# Altium PCB PCB-ESP32-C3-RF-V1.0.PcbDoc (part 1 of 4)
Units mil, origin at the board's own origin, x right, y up, seen from the top; angles counter-clockwise.
Board outline 1166.03 x 1736.03 mil, 4 copper layers (L1, L2, L3, L4), stack 30.315 mil thick; 70 components, 58 nets, 232 pads, 398 vias.
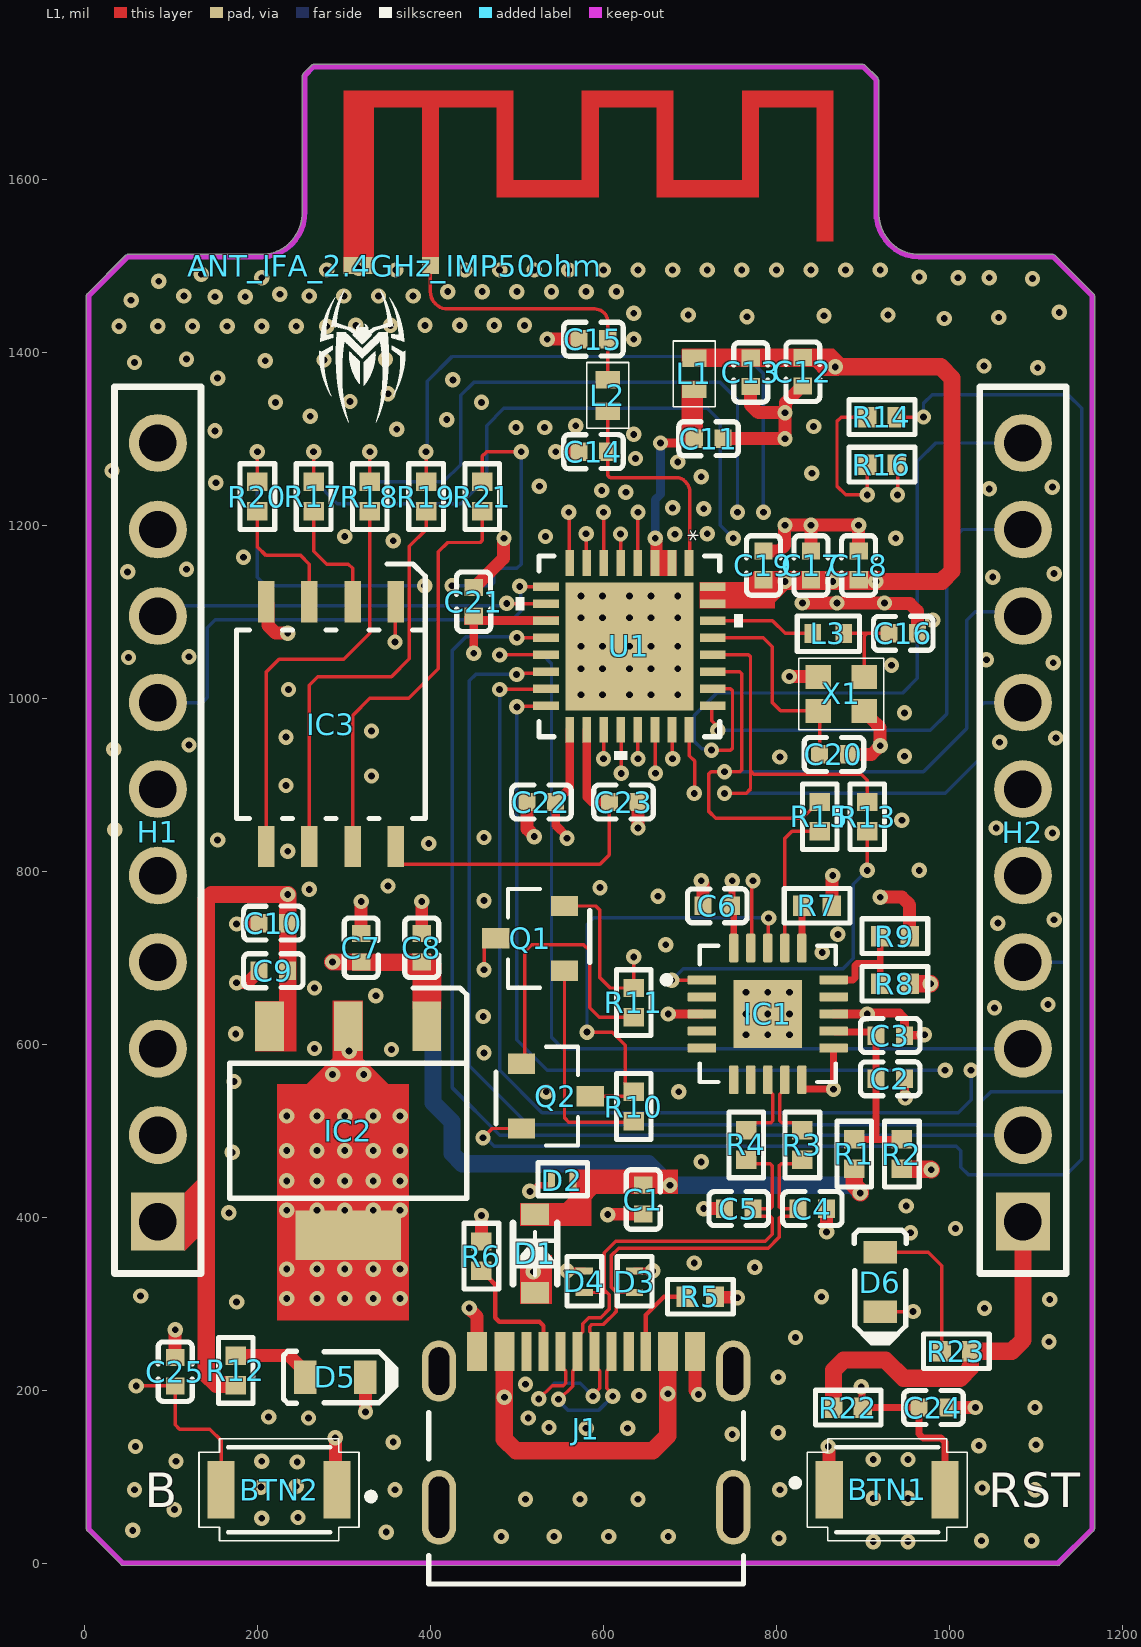
[diagram p0: L1 view]
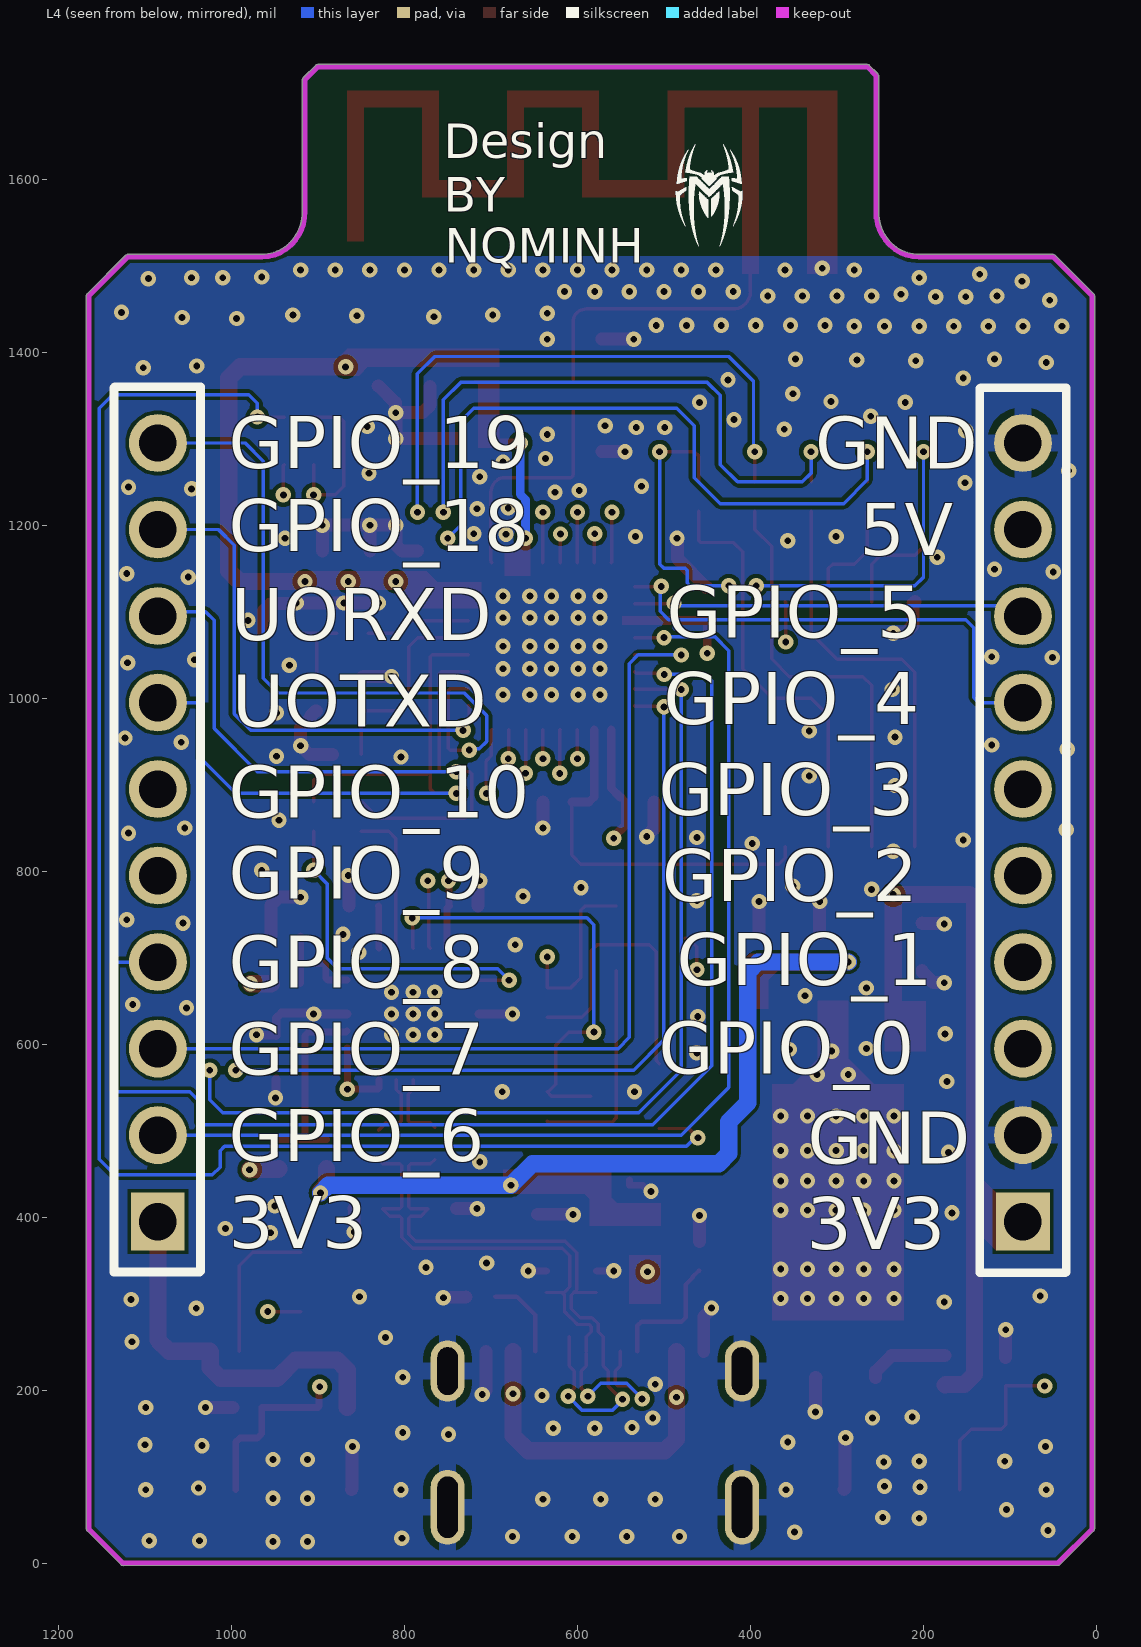
[diagram p1: L4 view, seen from below]
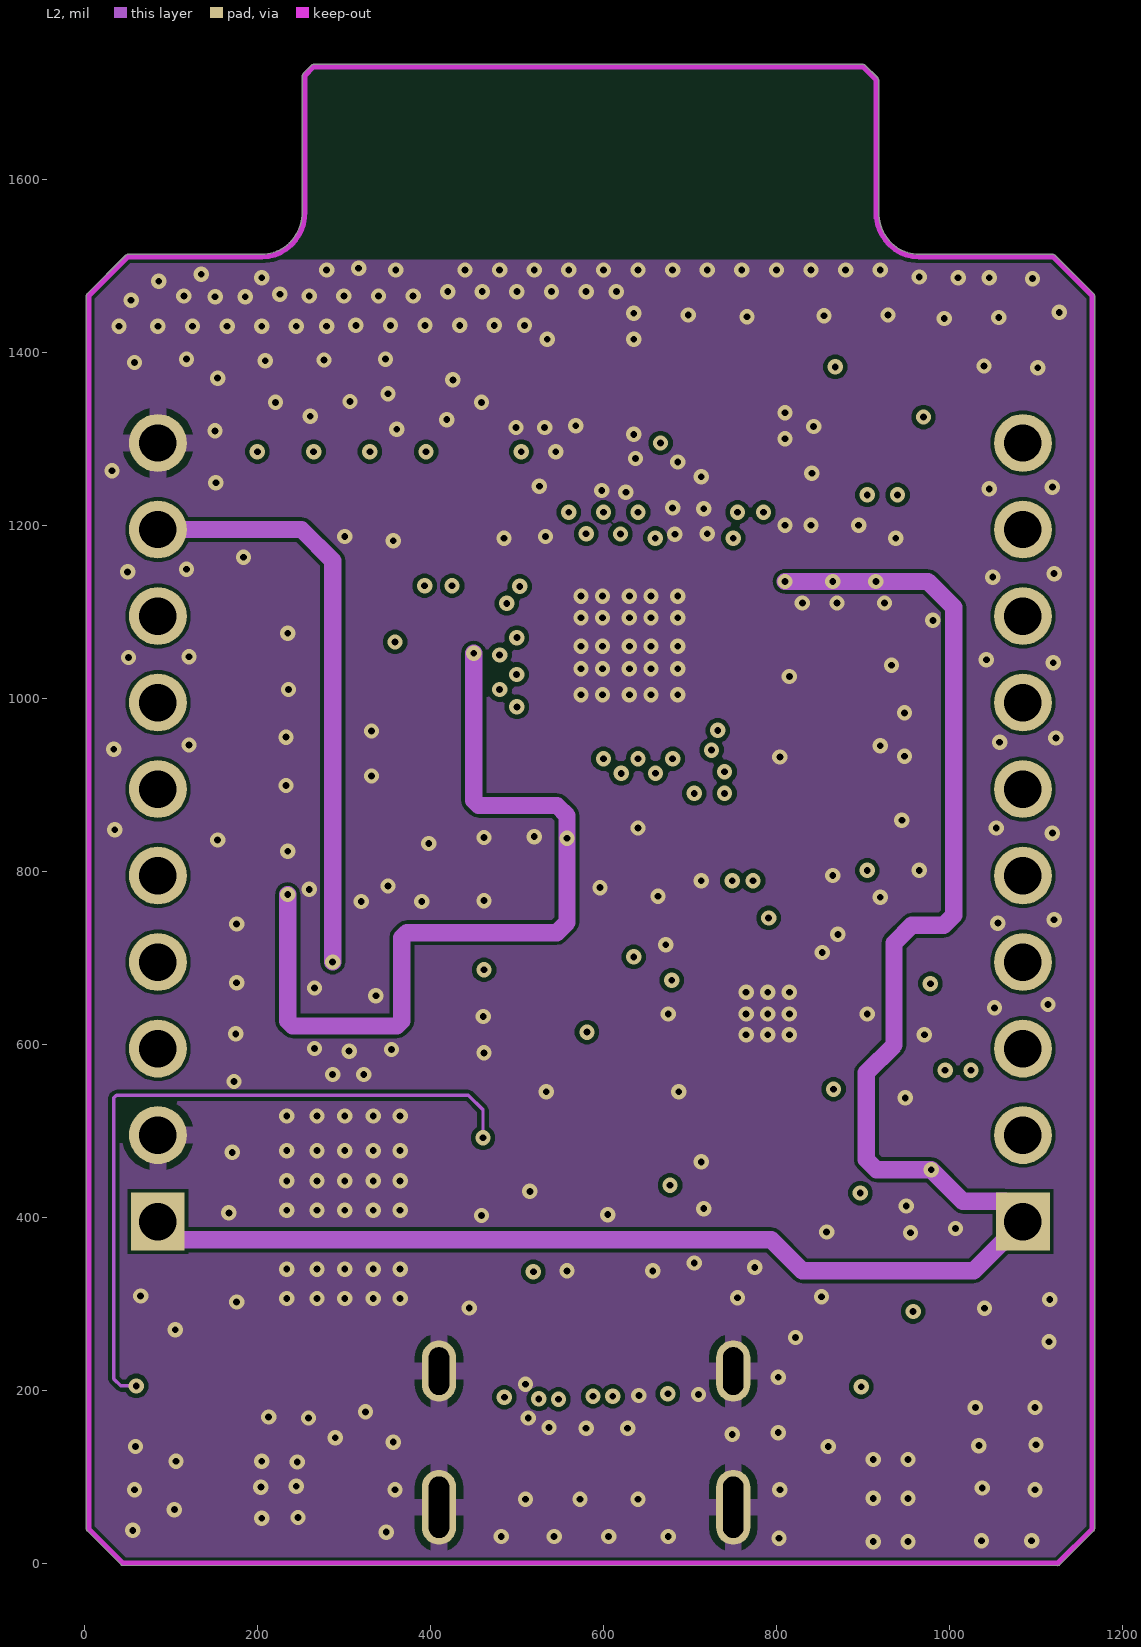
[diagram p2: L2]
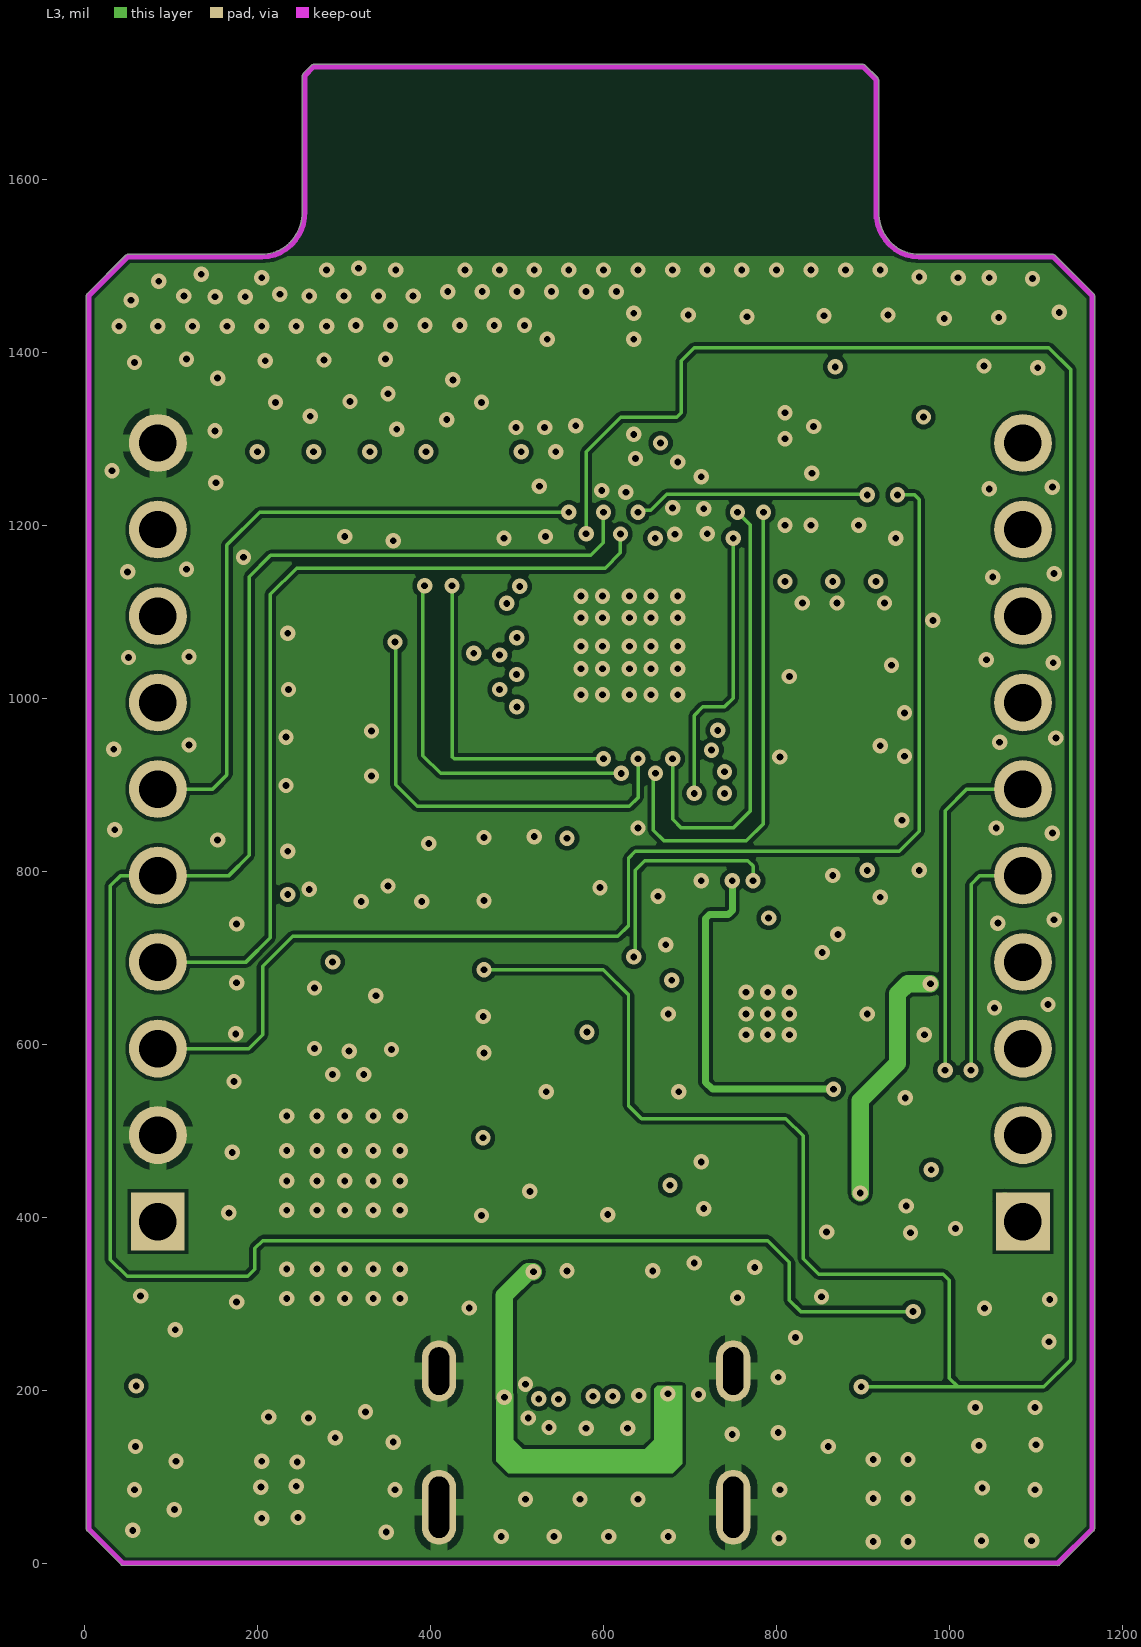
[diagram p3: L3]
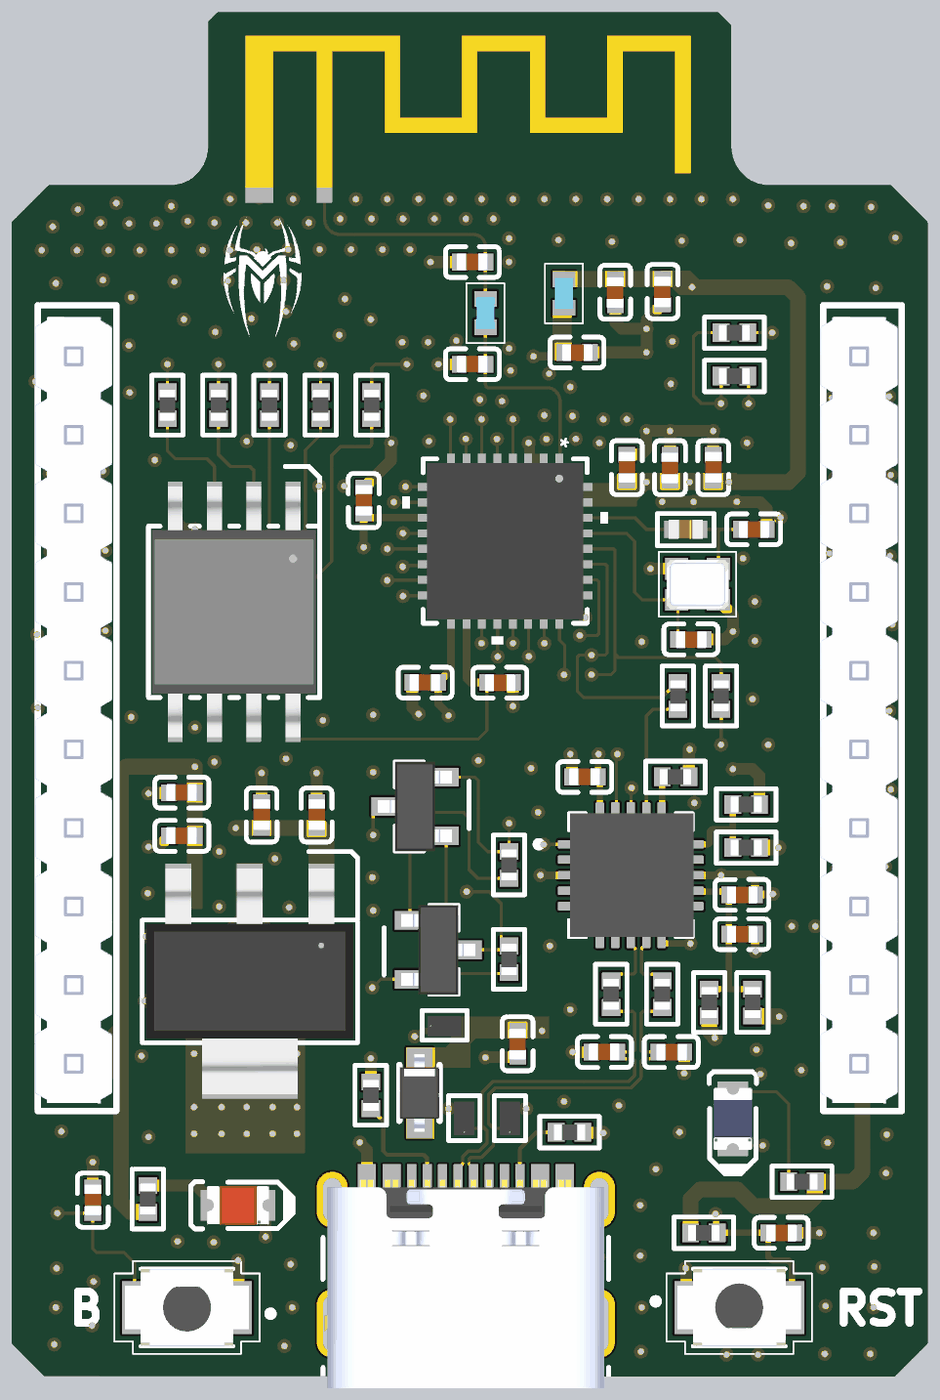
[diagram p5: 3D render of the assembled board from above, using the file's embedded part models]

## Layer stack, top to bottom
Top Solder: solder mask 0.5, Solder Resist, Dk 3.8
L1: signal copper 1.378
Dielectric 1: prepreg 7.874, 7628, Dk 4.6
L2: signal copper 0.689
Core: core 10.433, FR-4, Dk 4.5
L3: signal copper 0.689
Dielectric 2: prepreg 7.874, 7628, Dk 4.6
L4: signal copper 1.378
Bottom Solder: solder mask 0.5, Solder Resist, Dk 3.8

## Board outline
42.87,-2.13 2.87,37.87 1.98,40 1.98,1465 2.87,1467.13 47.87,1512.13 50,1513.02 205,1513.02 ccw(c205,1558.28) 237.01,1526.27 ccw(c200.86,1562.43) 251.98,1562.43 251.98,1720 252.87,1722.13 262.87,1732.13 265.02,1733.01 900,1733.02 902.13,1732.13 917.13,1717.13 918.02,1715 918.02,1562.43 ccw(c969.14,1562.43) 932.99,1526.27 ccw(c965,1558.28) 965,1513.02 1120,1513.02 1122.13,1512.13 1167.13,1467.13 1168.01,1465 1168.01,40 1167.13,37.87 1127.13,-2.13 1125,-3.01

## Design rules (kind name [scope] priority, off if disabled: settings)
BoardOutlineClearance [All] p1: gap=0 ignorepadtopadclearanceinfootprint=FALSE
Clearance ignore_Clearence_Antenna [WithinRoom('Antenna_2.4Ghz')] p1: gap=0 ignorepadtopadclearanceinfootprint=TRUE
Clearance [All] p2: gap=4 ignorepadtopadclearanceinfootprint=FALSE except(5: Arc-Via Track-Via SMDPad-Via THPad-Via Via-Via Via-Fill Via-Poly Via-Region Via-Text; 9.84: Arc-Hole Track-Hole SMDPad-Hole THPad-Hole Via-Hole Fill-Hole Poly-Hole Region-Hole Text-Hole)
ComponentClearance [All] p1: gap=4 collisioncheckmode=3 verticalgap=4 showdistances=TRUE
DiffPairsRouting [All] p1: maxlimit=4 minlimit=4 mostfreqgap=4 toplayer_minwidth=4 toplayer_maxwidth=71497.94 toplayer_prefwidth=4 midlayer1_minwidth=4 midlayer1_maxwidth=71497.94 midlayer1_prefwidth=4 midlayer2_minwidth=4 midlayer2_maxwidth=71497.94 midlayer2_prefwidth=4 bottomlayer_minwidth=4 bottomlayer_maxwidth=71497.94 bottomlayer_prefwidth=4 maxuncoupledlength=500
Height [All] p1: minheight=0 maxheight=71497.94 prefheight=500
HoleSize [All] p1: absolutevalues=TRUE maxlimit=248.03 minlimit=7.87 maxpercent=80.000 minpercent=20.000
HoleToHoleClearance [All] p1: gap=9.84 allowstackedmicrovias=FALSE
MinimumAnnularRing [All] p1: minimumring=3
MinimumSolderMaskSliver [All] p1: minsoldermaskwidth=0
PlaneClearance [All] p1: clearance=4
PlaneConnect PlaneConnectPowerPads [InPadClass('PowerPads')] p1: planeconnectstyle=Direct reliefexpansion=20 reliefentries=4 reliefconductorwidth=10 reliefairgap=10
PlaneConnect [All] p2: pad.planeconnectstyle=Relief pad.reliefexpansion=20 pad.reliefentries=4 pad.reliefconductorwidth=20 pad.reliefairgap=10 via.planeconnectstyle=Direct via.reliefexpansion=11.81 via.reliefentries=4 via.reliefconductorwidth=5 via.reliefairgap=5
PolygonConnect PolygonConnectPowerPads [All vs (InPadClass('PowerPads'))] p1: connectstyle=Direct reliefconductorwidth=10 reliefentries=4 polygonreliefangle="90 Angle" airgapwidth=10
PolygonConnect [All] p2: thpad.connectstyle=Relief thpad.reliefconductorwidth=20 thpad.reliefentries=4 thpad.polygonreliefangle="90 Angle" thpad.airgapwidth=8 smdpad.connectstyle=Relief smdpad.reliefconductorwidth=20 smdpad.reliefentries=4 smdpad.polygonreliefangle="90 Angle" smdpad.airgapwidth=8 via.connectstyle=Direct via.reliefconductorwidth=5 via.reliefentries=4 via.polygonreliefangle="90 Angle" via.airgapwidth=5
RoomDefinition Antenna_2.4Ghz [False vs False] p1: confinementstyle=ConfineIn formatcopy=TRUE lockcomponents=FALSE outline 279,1487 880,1487 880,1720 279,1720
RoutingVias [All] p1: holewidth=7.87 width=17.72 viastyle="Through Hole" minholewidth=7.87 minwidth=17.72 maxholewidth=248.03 maxwidth=257.87
ShortCircuit [WithinRoom('Antenna_2.4Ghz')] p1: allowed=TRUE
SilkToSilkClearance [All] p1: silktosilkclearance=0
SilkToSolderMaskClearance [IsPad] p1: minsilkscreentomaskgap=5 clearancetoexposedcopper=TRUE
SolderMaskExpansion [All] p1: expansion=2.95 istentingtop=FALSE
SupplyNets "Schematic Supply Nets_3" [InNet('+3V3_RF')] p1: voltage=0.000
SupplyNets "Schematic Supply Nets_2" [InNet('GND')] p2: voltage=0.000
SupplyNets "Schematic Supply Nets_1" [InNet('+5V')] p3: voltage=0.000
SupplyNets "Schematic Supply Nets" [InNet('+3V3')] p4: voltage=0.000
Width [All] p1: maxlimit=71497.94 minlimit=4 preferedwidth=4
19 further rules are at their usual default settings.

## Classes and differential pairs
component class USBC-UART: C1 C2 C3 C4 C5 C6 D1 D2 D3 D4 IC1 J1 Q1 Q2 R1 R2 R3 R4 R5 R6 R7 R8 R9 R10 R11
component class RF: C11 C12 C13 C14 C15 L1 L2
component class POWER_SUPPLY: C7 C8 C9 C10 D5 IC2 R12
component class MCU: BTN1 BTN2 C16 C17 C18 C19 C20 C21 C22 C23 C24 C25 D6 H1 H2 IC3 L3 R13 R14 R15 R16 R17 R18 R19 R20 R21 R22 R23 U1 X1
differential pair USB_D: +USB_D_P -USB_D_N
differential pair FTDI_USB: +FTDI_USB_P -FTDI_USB_N

## Components (designator, comment, footprint, x,y, rotation, side; value= is the part's Value field where it differs from the comment)
ANT_IFA_2.4GHz_IMP50ohm "ANT_IFA_2.4GHz" ANT_IFA_2.4GHZ 317.06,1500.1 r0 top
BTN1 "SWITCH TACTILE SPST-NO 0.05A 12V" SW_B3U-1000P 928.07,85 r0 top
BTN2 "SWITCH TACTILE SPST-NO 0.05A 12V" SW_B3U-1000P 225,85 r180 top
C1 "CAP CER 100nF 50V X5R 0402" C0402 646,422 r90 top value=100nF
C2 "CAP CER 47PF 50V C0G/NPO 0402" C0402 930,560 r180 top value=47pF
C3 "CAP CER 100nF 50V X5R 0402" C0402 930,610 r180 top value=100nF
C4 "CAP CER 47PF 50V C0G/NPO 0402" C0402 840,410 r180 top value=47pF
C5 "CAP CER 47PF 50V C0G/NPO 0402" C0402 758,410 r0 top value=47pF
C6 "CAP CER 100nF 50V X5R 0402" C0402 733.07,760 r0 top value=100nF
C7 "CAP CER 100nF 50V X5R 0402" C0402 320,710 r270 top value=100nF
C8 "CAP CER 47PF 50V C0G/NPO 0402" C0402 390,710 r270 top value=47pF
C9 "CAP CER 47PF 50V C0G/NPO 0402" C0402 220,685 r0 top value=47pF
C10 "CAP CER 100nF 50V X5R 0402" C0402 220,740 r0 top value=100nF
C11 "CAP CER 1UF 10V X5R 0402" C0402 720,1300 r180 top value=1µF
C12 "CAP CER 10UF 10V X5R 0402" C0402 830.57,1378.9 r90 top value=10µF
C13 "CAP CER 100nF 50V X5R 0402" C0402 770.28,1378.14 r90 top value=100nF
C14 "GRM1555C2A3R3CA01D" C0402 590,1285 r0 top value=3.3pF
C15 "GRM1555C2A3R3CA01D" C0402 590,1415 r0 top value=3.3pF
C16 "CAP CER 10PF 50V C0G/NPO 0402" C0402 945,1075 r180 top value=10pF
C17 "CAP CER 1UF 10V X5R 0402" C0402 840,1155 r90 top value=1µF
C18 "CAP CER 10000PF 16V X7R 0402" C0402 895,1151.93 r270 top value=10nF
C19 "CAP CER 10UF 10V X5R 0402" C0402 785,1151.93 r270 top value=10µF
C20 "CAP CER 10PF 50V C0G/NPO 0402" C0402 865,935 r180 top value=10pF
C21 "CAP CER 100nF 50V X5R 0402" C0402 450,1110 r270 top value=100nF
C22 "CAP CER 100nF 50V X5R 0402" C0402 529.84,880 r0 top value=100nF
C23 "CAP CER 1UF 10V X5R 0402" C0402 621.77,880 r180 top value=1µF
C24 "CAP CER 1UF 10V X5R 0402" C0402 980,180 r180 top value=1µF
C25 "CAP CER 1UF 10V X5R 0402" C0402 105,220 r270 top value=1µF
D1 "BAT20JFILM" SOD-323 521,358 r270 top value=20pF
D2 "TVS DIODE 5.3VWM 12VC SOD882" RTVS_SOD882_LTF-L 552.5,443 r0 top
D3 "TVS DIODE 5.3VWM 12VC SOD882" RTVS_SOD882_LTF-L 636,325.5 r90 top
D4 "TVS DIODE 5.3VWM 12VC SOD882" RTVS_SOD882_LTF-L 578,325.5 r90 top
D5 "LTST-C171KRKT" LED_LTST-C171_LTO-L 290,215 r180 top
D6 "LED BLUE CLEAR CHIP SMD" LED_0805_BLUE 920,325 r90 top
H1 "CONN HEADER VERT 10POS 2.54MM" "HEADER 1*10 2.54MM" 85,395 r90 top
H2 "CONN HEADER VERT 10POS 2.54MM" "HEADER 1*10 2.54MM" 1085,395 r90 top
IC1 "IC USB SERIAL FULL UART 20QFN" QFN50P400X400X80-21N 790,635 r0 top
IC2 "IC REG LIN 3.3V 1.5A SOT-223-4" DCY4_TEX-L 305,500 r180 top locked
IC3 "IC FLASH 32MBIT SPI/QUAD 8SOIC" SOIC-8_5P28X5P28_WIN-L 285,970 r270 top
J1 "CONN RCP USB2.0 TYP C 24P SMD RA" MOLEX_2171790001 580,110 r0 top
L1 "FIXED IND 2.2NH 2.53A 22 MOHM" INDC1006X60N 705,1375 r90 top value=2.2nH
L2 "FIXED IND 2.2NH 2.53A 22 MOHM" INDC1006X60N 605,1350 r270 top value=2.2nH
L3 "FIXED IND 27NH 200MA 900 MOHM" IND_L-0402_JOT-L 860,1075 r180 top value=27nH
Q1 "TRANS NPN 25V 1.5A SOT-23-3" TRANS_SS8050-G 515.24,722.4 r180 top
Q2 "TRANS NPN 25V 1.5A SOT-23-3" TRANS_SS8050-G 545,540 r0 top
R1 "RES 0 OHM JUMPER 1/16W 0402" R0402 911,511.99 r270 top value=0Ω
R2 "RES 0 OHM JUMPER 1/16W 0402" R0402 966,511.99 r270 top value=0Ω
R3 "RES SMD 27 OHM 1% 1/16W 0402" R0402 809,444.62 r90 top value=27Ω
R4 "RES SMD 27 OHM 1% 1/16W 0402" R0402 744,444.62 r90 top value=27Ω
R5 "RES 5.1kΩ ±1% 62.5mW 0402" R0402 672.99,329 r0 top value=5.1kΩ
R6 "RES 5.1kΩ ±1% 62.5mW 0402" R0402 438,315.99 r90 top value=5.1kΩ
R7 "RES SMD 10K OHM 1% 1/16W 0402" R0402 886.01,739 r180 top value=10kΩ
R8 "RES SMD 4.7K OHM 1% 1/16W 0402" R0402 898.01,691 r0 top value=4.7kΩ
R9 "RES SMD 10K OHM 1% 1/16W 0402" R0402 976.01,704 r180 top value=10kΩ
R10 "RES 5.1kΩ ±1% 62.5mW 0402" R0402 656,566.99 r270 top value=5.1kΩ
R11 "RES 5.1kΩ ±1% 62.5mW 0402" R0402 656,686.99 r270 top value=5.1kΩ
R12 "RES 5.1kΩ ±1% 62.5mW 0402" R0402 196,261.99 r270 top value=5.1kΩ
R13 "RES 0 OHM JUMPER 1/16W 0402" R0402 926,901.99 r270 top value=0Ω
R14 "RES SMD 27 OHM 1% 1/16W 0402" R0402 961.01,1304 r180 top value=27Ω
R15 "RES 0 OHM JUMPER 1/16W 0402" R0402 871,901.99 r270 top value=0Ω
R16 "RES SMD 27 OHM 1% 1/16W 0402" R0402 961.01,1249 r180 top value=27Ω
R17 "RES 0 OHM JUMPER 1/16W 0402" R0402 286,1271.99 r270 top value=0Ω
R18 "RES 0 OHM JUMPER 1/16W 0402" R0402 351,1271.99 r270 top value=0Ω
R19 "RES 0 OHM JUMPER 1/16W 0402" R0402 416,1271.99 r270 top value=0Ω
R20 "RES 0 OHM JUMPER 1/16W 0402" R0402 221,1271.99 r270 top value=0Ω
R21 "RES 0 OHM JUMPER 1/16W 0402" R0402 481,1271.99 r270 top value=0Ω
R22 "RES 5.1kΩ ±1% 62.5mW 0402" R0402 921.99,159 r180 top value=5.1kΩ
R23 "RES 560 OHM 1% 1/16W 0402" R0402 968.99,266 r0 top value=560Ω
U1 "ESP32-C3" ESP-C3 630,1060 r270 top
X1 "CRYSTAL 40.0000MHZ 8PF SMD" OSC_XRCGB40M000F1S1BR0 875,1005 r270 top

## Footprints (in the part's own frame and the unit in brackets; to place one, negate y for a bottom-side part, rotate by r counter-clockwise, add the part's x,y. Pads: shape width x height; smd on the part's side, far side on the other; paste and mask are expansions set on the pad)
ANT_IFA_2.4GHZ [mm]
  rect 0.9x0.5 smd mask-2539.97: 1(0,0)
  rect 0.5x0.5 smd mask-2539.97: 2(2.107,-0.003)
  L1 region: -0.45,-0.254 0.45,-0.254 0.45,5.146 -0.45,5.146
  L1 region: 13.95,5.146 13.45,5.146 13.45,0.706 13.95,0.706
  L1 region: 11.25,5.146 11.25,4.646 13.95,4.646 13.95,5.146
  L1 region: 11.25,2.006 11.75,2.006 11.75,5.146 11.25,5.146
  L1 region: 11.75,2.006 11.75,2.506 8.75,2.506 8.75,2.006
  L1 region: 9.25,5.146 8.75,5.146 8.75,2.006 9.25,2.006
  L1 region: 9.25,4.646 9.25,5.146 6.55,5.146 6.55,4.646
  L1 region: 1.857,-0.253 2.357,-0.253 2.357,5.146 1.857,5.146
  L1 region: -0.45,5.146 -0.45,4.646 4.55,4.646 4.55,5.146
  L1 region: 4.55,5.146 4.05,5.146 4.05,2.006 4.55,2.006
  L1 region: 7.05,2.006 7.05,2.506 4.05,2.506 4.05,2.006
  L1 region: 6.55,2.006 7.05,2.006 7.05,5.146 6.55,5.146
  L1 pour cut-out: -0.95,0.229 14.25,0.229 14.25,5.446 -0.95,5.446
C0402 [mm]
  rect 0.5x0.54 smd paste+0 mask+0.051: 1(-0.459,0) 2(0.381,0)
  silkscreen extent -0.91,-0.5 0.83,0.5, body extent -0.55,-0.27 0.45,0.28, height 0.51
DCY4_TEX-L [mil]
  rect 33x57.5 smd paste+0 mask+0: 1(-91,-120.75) 2(0,-120.75) 3(91,-120.75)
  rect 122x57.5 smd paste+0 mask+0: 4(0,120.75)
  silkscreen extent -137,-165 137,78, body extent -132,-144 132,144, height 67
ESP-C3 [mm]
  rect 0.757x0.255 smd paste+0 mask+0: 1(-2.449,1.75) 2(-2.449,1.25) 3(-2.449,0.75) 4(-2.449,0.25) 5(-2.449,-0.25) 6(-2.449,-0.75) 7(-2.449,-1.25) 8(-2.449,-1.75) 17(2.449,-1.75) 18(2.449,-1.25) 19(2.449,-0.75) 20(2.449,-0.25) 21(2.449,0.25) 22(2.449,0.75) 23(2.449,1.25) 24(2.449,1.75)
  rect 0.255x0.757 smd paste+0 mask+0: 9(-1.75,-2.449) 10(-1.25,-2.449) 11(-0.75,-2.449) 12(-0.25,-2.449) 13(0.25,-2.449) 14(0.75,-2.449) 15(1.25,-2.449) 16(1.75,-2.449) 25(1.75,2.449) 26(1.25,2.449) 27(0.75,2.449) 28(0.25,2.449) 29(-0.25,2.449) 30(-0.75,2.449) 31(-1.25,2.449) 32(-1.75,2.449)
  rect 3.759x3.759 smd paste-1.88 mask+0: 33(0,0)
  silkscreen extent -2.65,-3.34 3.34,3.34, body extent -2.53,-2.53 2.53,2.53, height 0.89
"HEADER 1*10 2.54MM" [mm]
  rect 1.7x1.575 hole 1.1 paste-2539.97 mask+0.051: 1(0,0)
  round 1.7 hole 1.1 paste-2539.97 mask+0.051: 2(2.54,0) 3(5.08,0) 4(7.62,0) 5(10.16,0) 6(12.7,0) 7(15.24,0) 8(17.78,0) 9(20.32,0) 10(22.86,0)
  silkscreen extent -1.52,-1.27 24.51,1.27, body extent -1.27,-1.14 24.13,1.36, height 8.11
IND_L-0402_JOT-L [mil]
  rect 19x22 smd paste+0 mask+0: 1(-18,0) 2(18,0)
  silkscreen extent -36,-20 36,21, body extent -21,-12 21,12, height 24
INDC1006X60N [mm]
  rect 0.51x0.73 smd: 1(-0.46,0) 2(0.46,0)
  silkscreen extent -0.96,-0.62 0.96,0.62, body extent -0.5,-0.3 0.5,0.3, height 0.61
LED_0805_BLUE [mil]
  rect 26x39 smd paste+0 mask+0: 1(-34.5,0) 2(34.5,0)
  silkscreen extent -70,-30 60,30, body extent -39,-25 39,25, height 31
LED_LTST-C171_LTO-L [mil]
  rect 26x39 smd paste+0 mask+0: 1(-34.5,0) 2(34.5,0)
  silkscreen extent -70,-30 60,30, body extent -39,-25 39,25, height 31
MOLEX_2171790001 [mm]
  rect 0.59x1.15 smd mask+0.064: A1B12(-3.2,3.425) A4B9(-2.4,3.425) B1A12(3.2,3.425) B4A9(2.4,3.425)
  rect 0.298x1.15 smd mask+0.064: A5(-1.25,3.425) A6(-0.25,3.425) A7(0.25,3.425) A8(1.25,3.425) B5(1.75,3.425) B6(0.75,3.425) B7(-0.75,3.425) B8(-1.75,3.425)
  oval 1x2.2 hole 0.6 slot 1.8 at 90 deg mask+0.064: SH1(-4.32,-1.15) SH2(4.32,-1.15)
  oval 1x1.8 hole 0.6 slot 1.4 at 90 deg mask+0.064: SH3(-4.32,2.85) SH4(4.32,2.85)
  silkscreen extent -4.62,-3.4 4.62,1.63, body extent -4.47,-3.25 4.47,3.5, height 3.24
OSC_XRCGB40M000F1S1BR0 [mm]
  rect 0.7x0.75 smd: 1(-0.5,0.675) 2(-0.5,-0.675) 3(0.5,-0.675) 4(0.5,0.675)
  silkscreen extent -1.05,-1.25 1.05,1.25, body extent -0.8,-1 0.8,1, height 0.7
QFN50P400X400X80-21N [mm]
  rrect25% 0.84x0.27 smd: 1(-1.935,1) 2(-1.935,0.5) 3(-1.935,0) 4(-1.935,-0.5) 5(-1.935,-1) 11(1.935,-1) 12(1.935,-0.5) 13(1.935,0) 14(1.935,0.5) 15(1.935,1)
  rrect25% 0.27x0.84 smd: 6(-1,-1.935) 7(-0.5,-1.935) 8(0,-1.935) 9(0.5,-1.935) 10(1,-1.935) 16(1,1.935) 17(0.5,1.935) 18(0,1.935) 19(-0.5,1.935) 20(-1,1.935)
  rect 2x2 smd paste-0.37: 21(0,0)
  silkscreen extent -3.07,-2 2,2, body extent -1.97,-2 2.03,2, height 0.81
R0402 [mm]
  rect 0.54x0.6 smd: 1(0.559,-0.533) 2(1.423,-0.533)
  silkscreen extent 0.03,-1.04 1.96,-0.03, body extent 0.49,-0.78 1.49,-0.28, height 0.37
RTVS_SOD882_LTF-L [mil]
  rect 8.06x20.03 smd paste+0 mask+0: 1(-12.5,0) 2(12.5,0)
  silkscreen extent -28,-18 29,20, body extent -21,-13 21,13, height 22
SOD-323 [mm]
  rect 0.63x0.83 smd: A(1.15,0) C(-1.15,0)
  silkscreen extent -0.9,-0.65 0.9,0.65, body extent -1.25,-0.64 1.25,0.64, height 1.17
SOIC-8_5P28X5P28_WIN-L [mil]
  rect 47.75x19 smd paste+0 mask+0: 1(-141.53,75) 2(-141.53,25) 3(-141.53,-25) 4(-141.53,-75) 5(141.53,-75) 6(141.53,-25) 7(141.53,25) 8(141.53,75)
  silkscreen extent -185,-109 109,109, body extent -159,-104 159,104, height 85
SW_B3U-1000P [mm]
  rect 0.8x1.7 smd: 1(-1.7,0) 2(1.7,0)
  silkscreen extent -2.8,-1.5 2.35,1.5, body extent -2,-1.25 2,1.25, height 1.76
TRANS_SS8050-G [mm]
  rect 0.8x0.6 smd: 1(-1.01,0.95) 2(-1.01,-0.95) 3(1.01,0)
  silkscreen extent -1.75,-1.45 0.65,1.45, body extent -1.2,-1.45 1.2,1.45, height 1.16

## Part data
BTN1 BTN2: library part B3U-1000P, "Switch Tactile N.O. SPST Round Button Solder Tab 12VDC 200000Cycles 1.5N SMD Emboss T/R", Ambient Temperature Range High=70°C, Color=Silver, Contact Current Rating=50mA, Contact Resistance=100mΩ, Insulation Resistance=100MΩ, LCSC Part=C231329, Manufacturer=Omron, Manufacturer Package Identifier=B3U-1000P(M), Max Voltage Rating (DC)=12V, Min Operating Temperature=-25°C, Operating Force=1.99N, Ratings="Dust Proof, IP40", Supplier Part Number=SW1020CT-ND, Actuator Length=400µm, Category="Tactile Switches", ComponentLink1Description=https://datasheet.octopart.com:443/B3U-1000P-Omron-datasheet-62106914.pdf?src-supplier=IHS, ComponentLink1URL=https://datasheet.octopart.com:443/B3U-1000P-Omron-datasheet-62106914.pdf?src-supplier=IHS, ComponentLink2Description=https://datasheet.octopart.com:443/B3U-1000P-Omron-datasheet-10910421.pdf?src-supplier=RS+(Formerly+Allied+Electronics), ComponentLink2URL=https://datasheet.octopart.com:443/B3U-1000P-Omron-datasheet-10910421.pdf?src-supplier=RS+(Formerly+Allied+Electronics), ComponentLink3Description=https://datasheet.octopart.com:443/B3U-1000P-Omron-datasheet-5458533.pdf?src-supplier=Upverter, ComponentLink3URL=https://datasheet.octopart.com:443/B3U-1000P-Omron-datasheet-5458533.pdf?src-supplier=Upverter, ComponentLink4Description=https://datasheet.octopart.com:443/B3U-1000P-Omron-datasheet-11968313.pdf?src-supplier=SOS+electronic, ComponentLink4URL=https://datasheet.octopart.com:443/B3U-1000P-Omron-datasheet-11968313.pdf?src-supplier=SOS+electronic, ComponentLink5Description=https://datasheet.octopart.com:443/B3U-1000P-Omron-datasheet-110759174.pdf?src-supplier=Newark, ComponentLink5URL=https://datasheet.octopart.com:443/B3U-1000P-Omron-datasheet-110759174.pdf?src-supplier=Newark, ComponentLink6Description=https://datasheet.octopart.com:443/B3U-1000P-Omron-datasheet-506776.pdf?src-supplier=Newark, ComponentLink6URL=https://datasheet.octopart.com:443/B3U-1000P-Omron-datasheet-506776.pdf?src-supplier=Newark, ComponentLink7Description=https://datasheet.octopart.com:443/B3U-1000P-Omron-datasheet-17589256.pdf?src-supplier=TME, ComponentLink7URL=https://datasheet.octopart.com:443/B3U-1000P-Omron-datasheet-17589256.pdf?src-supplier=TME, Contact Material=Silver, Contact Plating=Silver, Current Rating=50mA, Depth=2.5mm, Electrical Life=200kcycles, Height=1.2mm, Illumination Type="Illuminated, Non-Illuminated", Lead Free="Lead Free", Length=3mm, Life (Cycles)=200kcycles, Lifecycle Status=Production, Manufacturer Part Number=B3U-1000P, Max Current Rating=50mA, Max Operating Temperature=70°C, Mechanical Life=200kcycles, Mounting Technology="Surface Mount", Number of Positions=1, Packaging="Tape and Reel", Pins=2, Pricing="1=1,17, 10=0,997, 25=0,9268, 100=0,8261, 250=0,76544, 500=0,72342, 1000=0,68504 (USD)", REACH SVHC=Yes, RoHS=Compliant, Sealable="DUST PROOF", Stock=127276, Supplier=DigiKey, Switch Function=Off-Mom, Switch Travel=150µm, Termination=SMD/SMT, Throw Configuration=SPST, Voltage Rating (DC)=12V, Weight=21.99923mg, Width=2.5mm
C1 C3 C6 C7 C10 C13 C21 C22: library part CC0402KRX5R9BB104, "50V 100nF X5R ±10% 0402 Multilayer Ceramic Capacitors MLCC - SMD/SMT ROHS", Case/Package=0402, Dielectric=X5R, Dielectric Material=Ceramic, LCSC Part=C105882, Manufacturer="Yageo Group", Max Operating Temperature=85°C, Min Operating Temperature=-55°C, Supplier Part Number=311-3342-2-ND, Temperature Coefficient=30ppm/°C, Tolerance=10%, Voltage Rating=50V, Category="Ceramic Capacitors", China RoHS=Compliant, ComponentLink1Description=https://datasheet.octopart.com:443/CC0402KRX5R9BB104-Yageo-datasheet-170350636.pdf?src-supplier=IHS, ComponentLink1URL=https://datasheet.octopart.com:443/CC0402KRX5R9BB104-Yageo-datasheet-170350636.pdf?src-supplier=IHS, ComponentLink2Description=https://datasheet.octopart.com:443/CC0402KRX5R9BB104-Yageo-datasheet-78855684.pdf?src-supplier=Upverter, ComponentLink2URL=https://datasheet.octopart.com:443/CC0402KRX5R9BB104-Yageo-datasheet-78855684.pdf?src-supplier=Upverter, ComponentLink3Description=https://datasheet.octopart.com:443/CC0402KRX5R9BB104-Yageo-datasheet-140260304.pdf?src-supplier=Newark, ComponentLink3URL=https://datasheet.octopart.com:443/CC0402KRX5R9BB104-Yageo-datasheet-140260304.pdf?src-supplier=Newark, ComponentLink4Description=https://datasheet.octopart.com:443/CC0402KRX5R9BB104-Yageo-datasheet-158238148.pdf?src-supplier=Newark, ComponentLink4URL=https://datasheet.octopart.com:443/CC0402KRX5R9BB104-Yageo-datasheet-158238148.pdf?src-supplier=Newark, ComponentLink5Description=https://datasheet.octopart.com:443/CC0402KRX5R9BB104-Yageo-datasheet-182029422.pdf?src-supplier=Farnell, ComponentLink5URL=https://datasheet.octopart.com:443/CC0402KRX5R9BB104-Yageo-datasheet-182029422.pdf?src-supplier=Farnell, ComponentLink6Description=https://datasheet.octopart.com/CC0402KRX5R9BB104-Yageo-datasheet-86397281.pdf, ComponentLink6URL=https://datasheet.octopart.com/CC0402KRX5R9BB104-Yageo-datasheet-86397281.pdf, ComponentLink7Description=https://datasheet.octopart.com:443/CC0402KRX5R9BB104-Yageo-datasheet-149070021.pdf?src-supplier=TME, ComponentLink7URL=https://datasheet.octopart.com:443/CC0402KRX5R9BB104-Yageo-datasheet-149070021.pdf?src-supplier=TME, ComponentLink8Description=https://datasheet.octopart.com:443/CC0402KRX5R9BB104-Yageo-Group-datasheet-145016144.pdf?src-supplier=ODG+(Origin+Data+Global), ComponentLink8URL=https://datasheet.octopart.com:443/CC0402KRX5R9BB104-Yageo-Group-datasheet-145016144.pdf?src-supplier=ODG+(Origin+Data+Global), ComponentLink9Description=https://datasheet.octopart.com:443/CC0402KRX5R9BB104-Yageo-datasheet-137875056.pdf?src-supplier=Future+Electronics, ComponentLink9URL=https://datasheet.octopart.com:443/CC0402KRX5R9BB104-Yageo-datasheet-137875056.pdf?src-supplier=Future+Electronics, ComponentLink10Description=https://datasheet.octopart.com:443/CC0402KRX5R9BB104-Yageo-datasheet-137700085.pdf?src-supplier=Future+Electronics, ComponentLink10URL=https://datasheet.octopart.com:443/CC0402KRX5R9BB104-Yageo-datasheet-137700085.pdf?src-supplier=Future+Electronics, ComponentLink11Description=https://datasheet.octopart.com:443/CC0402KRX5R9BB104-Yageo-datasheet-62067349.pdf?src-supplier=Future+Electronics, ComponentLink11URL=https://datasheet.octopart.com:443/CC0402KRX5R9BB104-Yageo-datasheet-62067349.pdf?src-supplier=Future+Electronics, ComponentLink12Description=https://datasheet.octopart.com:443/CC0402KRX5R9BB104-Yageo-datasheet-68071816.pdf?src-supplier=Future+Electronics, ComponentLink12URL=https://datasheet.octopart.com:443/CC0402KRX5R9BB104-Yageo-datasheet-68071816.pdf?src-supplier=Future+Electronics, ComponentLink13Description=https://datasheet.octopart.com:443/CC0402KRX5R9BB104-Yageo-datasheet-68297942.pdf?src-supplier=Future+Electronics, ComponentLink13URL=https://datasheet.octopart.com:443/CC0402KRX5R9BB104-Yageo-datasheet-68297942.pdf?src-supplier=Future+Electronics, ComponentLink14Description=http://sigma.octopart.com:80/conflict_mineral_statement/Yageo-company-3.pdf?src-supplier=Compliance+Statements, ComponentLink14URL=http://sigma.octopart.com:80/conflict_mineral_statement/Yageo-company-3.pdf?src-supplier=Compliance+Statements, ComponentLink15Description=http://sigma.octopart.com:80/rohs_statement/Yageo-company-2.pdf?src-supplier=Compliance+Statements, ComponentLink15URL=http://sigma.octopart.com:80/rohs_statement/Yageo-company-2.pdf?src-supplier=Compliance+Statements, Country of Origin="Mainland China, Taiwan", Export Control Classification Number (ECCN) Code=EAR99, Halogen Free="Halogen Free", Harmonized Tariff Schedule (HTS) Code=8532.24.00.20, Height=500µm, Introduction Date=2013-02-05, Lead Free="Lead Free", Length=1mm, Lifecycle Status=Production, Manufacturer Part Number=CC0402KRX5R9BB104, Material=Ceramic, Mounting Technology="Surface Mount", Number of Terminals=2, Pricing="10000=0,00742, 20000=0,00677, 30000=0,00644, 50000=0,00608, 70000=0,00587, 100000=0,00567 (USD)", REACH SVHC=Yes, RoHS=Compliant, Schedule B="8532240020, 8532240020|8532240020|8532240020|8532240020|8532240020|8532240020|8532240020|8532240020|8532240020|8532240020|8532240020|8532240020|8532240020|8532240020|8532240020|8532240020|8532240020|8532240020|8532240020|8532240020|8532240020|8532240020|8532240020|85", Stock=2840000, Supplier=DigiKey, Thickness=558.8µm, Voltage Rating (DC)=50V, Width=500µm
C2 C4 C5 C8 C9: library part CC0402FRNPO9BN470, "50V 47pF NP0 ±1% 0402 Multilayer Ceramic Capacitors MLCC - SMD/SMT ROHS", Case Code (Imperial)=0402, Case Code (Metric)=1005, Dielectric=C0G, Dielectric Material=Ceramic, LCSC Part=C277503, Manufacturer="Yageo Group", Max Operating Temperature=125°C, Min Operating Temperature=-55°C, Supplier Part Number=311-1646-1-ND, Tolerance=1%, Voltage Rating=50V, Case/Package=0402, Category="Ceramic Capacitors", China RoHS=Compliant, ComponentLink1Description=https://datasheet.octopart.com:443/CC0402FRNPO9BN470-Yageo-datasheet-182140217.pdf?src-supplier=IHS, ComponentLink1URL=https://datasheet.octopart.com:443/CC0402FRNPO9BN470-Yageo-datasheet-182140217.pdf?src-supplier=IHS, ComponentLink2Description=https://datasheet.octopart.com:443/CC0402FRNPO9BN470-Yageo-datasheet-181966869.pdf?src-supplier=Newark, ComponentLink2URL=https://datasheet.octopart.com:443/CC0402FRNPO9BN470-Yageo-datasheet-181966869.pdf?src-supplier=Newark, ComponentLink3Description=https://datasheet.octopart.com:443/CC0402FRNPO9BN470-Yageo-datasheet-181966868.pdf?src-supplier=Newark, ComponentLink3URL=https://datasheet.octopart.com:443/CC0402FRNPO9BN470-Yageo-datasheet-181966868.pdf?src-supplier=Newark, ComponentLink4Description=https://datasheet.octopart.com:443/CC0402FRNPO9BN470-Yageo-datasheet-151948684.pdf?src-supplier=element14+APAC, ComponentLink4URL=https://datasheet.octopart.com:443/CC0402FRNPO9BN470-Yageo-datasheet-151948684.pdf?src-supplier=element14+APAC, ComponentLink5Description=https://datasheet.octopart.com:443/CC0402FRNPO9BN470-Yageo-datasheet-137875056.pdf?src-supplier=Future+Electronics, ComponentLink5URL=https://datasheet.octopart.com:443/CC0402FRNPO9BN470-Yageo-datasheet-137875056.pdf?src-supplier=Future+Electronics, ComponentLink6Description=https://datasheet.octopart.com:443/CC0402FRNPO9BN470-Yageo-datasheet-136957424.pdf?src-supplier=Future+Electronics, ComponentLink6URL=https://datasheet.octopart.com:443/CC0402FRNPO9BN470-Yageo-datasheet-136957424.pdf?src-supplier=Future+Electronics, ComponentLink7Description=https://datasheet.octopart.com:443/CC0402FRNPO9BN470-Yageo-datasheet-137700082.pdf?src-supplier=Future+Electronics, ComponentLink7URL=https://datasheet.octopart.com:443/CC0402FRNPO9BN470-Yageo-datasheet-137700082.pdf?src-supplier=Future+Electronics, ComponentLink8Description=https://datasheet.octopart.com:443/CC0402FRNPO9BN470-Yageo-datasheet-78855684.pdf?src-supplier=Future+Electronics, ComponentLink8URL=https://datasheet.octopart.com:443/CC0402FRNPO9BN470-Yageo-datasheet-78855684.pdf?src-supplier=Future+Electronics, ComponentLink9Description=https://datasheet.octopart.com:443/CC0402FRNPO9BN470-Yageo-datasheet-16730043.pdf?src-supplier=Future+Electronics, ComponentLink9URL=https://datasheet.octopart.com:443/CC0402FRNPO9BN470-Yageo-datasheet-16730043.pdf?src-supplier=Future+Electronics, ComponentLink10Description=https://datasheet.octopart.com:443/CC0402FRNPO9BN470-Yageo-datasheet-12589826.pdf?src-supplier=Future+Electronics, ComponentLink10URL=https://datasheet.octopart.com:443/CC0402FRNPO9BN470-Yageo-datasheet-12589826.pdf?src-supplier=Future+Electronics, ComponentLink11Description=https://datasheet.octopart.com:443/CC0402FRNPO9BN470-Yageo-datasheet-10406438.pdf?src-supplier=Future+Electronics, ComponentLink11URL=https://datasheet.octopart.com:443/CC0402FRNPO9BN470-Yageo-datasheet-10406438.pdf?src-supplier=Future+Electronics, ComponentLink12Description=https://datasheet.octopart.com:443/CC0402FRNPO9BN470-Yageo-datasheet-8817079.pdf?src-supplier=Future+Electronics, ComponentLink12URL=https://datasheet.octopart.com:443/CC0402FRNPO9BN470-Yageo-datasheet-8817079.pdf?src-supplier=Future+Electronics, ComponentLink13Description=https://datasheet.octopart.com:443/CC0402FRNPO9BN470-Yageo-datasheet-8324240.pdf?src-supplier=Future+Electronics, ComponentLink13URL=https://datasheet.octopart.com:443/CC0402FRNPO9BN470-Yageo-datasheet-8324240.pdf?src-supplier=Future+Electronics, ComponentLink14Description=https://datasheet.octopart.com:443/CC0402FRNPO9BN470-Yageo-datasheet-504625.pdf?src-supplier=Future+Electronics, ComponentLink14URL=https://datasheet.octopart.com:443/CC0402FRNPO9BN470-Yageo-datasheet-504625.pdf?src-supplier=Future+Electronics, ComponentLink15Description=https://datasheet.octopart.com:443/CC0402FRNPO9BN470-Yageo-datasheet-5321569.pdf?src-supplier=Future+Electronics, ComponentLink15URL=https://datasheet.octopart.com:443/CC0402FRNPO9BN470-Yageo-datasheet-5321569.pdf?src-supplier=Future+Electronics, ComponentLink16Description=http://sigma.octopart.com:80/conflict_mineral_statement/Yageo-company-3.pdf?src-supplier=Compliance+Statements, ComponentLink16URL=http://sigma.octopart.com:80/conflict_mineral_statement/Yageo-company-3.pdf?src-supplier=Compliance+Statements, ComponentLink17Description=http://sigma.octopart.com:80/rohs_statement/Yageo-company-2.pdf?src-supplier=Compliance+Statements, ComponentLink17URL=http://sigma.octopart.com:80/rohs_statement/Yageo-company-2.pdf?src-supplier=Compliance+Statements, Composition=Ceramic, Depth=500µm, Halogen Free="Halogen Free", Height=500µm, Lead Free="Lead Free", Length=1mm, Lifecycle Status=Production, Manufacturer Part Number=CC0402FRNPO9BN470, Mounting Technology="Surface Mount", Number of Terminals=2, Packaging="Tape and Reel", Pricing="1=0,1, 10=0,05, 50=0,034, 100=0,0292, 500=0,02122, 1000=0,01878, 2500=0,01622, 5000=0,01467 (USD)", Radiation Hardening=No, REACH SVHC=Yes, RoHS=Compliant, Schedule B="8532240020, 8532240020|8532240020|8532240020|8532240020|8532240020", Stock=93603, Supplier=DigiKey, Termination=SMD/SMT, Thickness=558.8µm, Voltage Rating (DC)=50V, Weight=652.039032µg, Width=500µm
C11 C17 C23 C24 C25: library part CC0402KRX5R6BB105, "Multilayer Ceramic Capacitors MLCC – SMD/SMT; YAGEO; CC0402KRX5R6BB105; 1 µF; 0402; 10 V; 10 V", Case Code (Imperial)=0402, Case Code (Metric)=1005, Dielectric=X5R, Dielectric Material=Ceramic, LCSC Part=C106254, Manufacturer="Yageo Group", Max Operating Temperature=85°C, Min Operating Temperature=-55°C, Supplier Part Number=311-1439-1-ND, Temperature Coefficient=30ppm/°C, Tolerance=10%, Voltage Rating=10V, Case/Package=0402, Category="Ceramic Capacitors", China RoHS=Compliant, ComponentLink1Description=https://datasheet.octopart.com:443/CC0402KRX5R6BB105-Yageo-datasheet-170350636.pdf?src-supplier=IHS, ComponentLink1URL=https://datasheet.octopart.com:443/CC0402KRX5R6BB105-Yageo-datasheet-170350636.pdf?src-supplier=IHS, ComponentLink2Description=https://datasheet.octopart.com:443/CC0402KRX5R6BB105-Yageo-datasheet-10911834.pdf?src-supplier=Farnell, ComponentLink2URL=https://datasheet.octopart.com:443/CC0402KRX5R6BB105-Yageo-datasheet-10911834.pdf?src-supplier=Farnell, ComponentLink3Description=https://datasheet.octopart.com:443/CC0402KRX5R6BB105-Yageo-datasheet-78855684.pdf?src-supplier=Upverter, ComponentLink3URL=https://datasheet.octopart.com:443/CC0402KRX5R6BB105-Yageo-datasheet-78855684.pdf?src-supplier=Upverter, ComponentLink4Description=https://datasheet.octopart.com:443/CC0402KRX5R6BB105-Yageo-datasheet-8324442.pdf?src-supplier=element14+APAC, ComponentLink4URL=https://datasheet.octopart.com:443/CC0402KRX5R6BB105-Yageo-datasheet-8324442.pdf?src-supplier=element14+APAC, ComponentLink5Description=https://datasheet.octopart.com:443/CC0402KRX5R6BB105-Yageo-datasheet-181967186.pdf?src-supplier=Newark, ComponentLink5URL=https://datasheet.octopart.com:443/CC0402KRX5R6BB105-Yageo-datasheet-181967186.pdf?src-supplier=Newark, ComponentLink6Description=https://datasheet.octopart.com:443/CC0402KRX5R6BB105-Yageo-datasheet-181967185.pdf?src-supplier=Newark, ComponentLink6URL=https://datasheet.octopart.com:443/CC0402KRX5R6BB105-Yageo-datasheet-181967185.pdf?src-supplier=Newark, ComponentLink7Description=https://datasheet.octopart.com:443/CC0402KRX5R6BB105-Yageo-datasheet-519481.pdf?src-supplier=Newark, ComponentLink7URL=https://datasheet.octopart.com:443/CC0402KRX5R6BB105-Yageo-datasheet-519481.pdf?src-supplier=Newark, ComponentLink8Description=https://datasheet.octopart.com:443/CC0402KRX5R6BB105-Yageo-datasheet-62067349.pdf?src-supplier=Newark, ComponentLink8URL=https://datasheet.octopart.com:443/CC0402KRX5R6BB105-Yageo-datasheet-62067349.pdf?src-supplier=Newark, ComponentLink9Description=https://datasheet.octopart.com:443/CC0402KRX5R6BB105-Yageo-datasheet-169689537.pdf?src-supplier=Newark, ComponentLink9URL=https://datasheet.octopart.com:443/CC0402KRX5R6BB105-Yageo-datasheet-169689537.pdf?src-supplier=Newark, ComponentLink10Description=https://datasheet.octopart.com:443/CC0402KRX5R6BB105-Yageo-datasheet-158238148.pdf?src-supplier=JRH+Electronics, ComponentLink10URL=https://datasheet.octopart.com:443/CC0402KRX5R6BB105-Yageo-datasheet-158238148.pdf?src-supplier=JRH+Electronics, ComponentLink11Description=https://datasheet.octopart.com/CC0402KRX5R6BB105-Yageo-datasheet-86397281.pdf, ComponentLink11URL=https://datasheet.octopart.com/CC0402KRX5R6BB105-Yageo-datasheet-86397281.pdf, ComponentLink12Description=https://datasheet.octopart.com:443/CC0402KRX5R6BB105-Yageo-datasheet-149070021.pdf?src-supplier=TME, ComponentLink12URL=https://datasheet.octopart.com:443/CC0402KRX5R6BB105-Yageo-datasheet-149070021.pdf?src-supplier=TME, ComponentLink13Description=https://datasheet.octopart.com:443/CC0402KRX5R6BB105-Yageo-Group-datasheet-145016144.pdf?src-supplier=ODG+(Origin+Data+Global), ComponentLink13URL=https://datasheet.octopart.com:443/CC0402KRX5R6BB105-Yageo-Group-datasheet-145016144.pdf?src-supplier=ODG+(Origin+Data+Global), ComponentLink14Description=https://datasheet.octopart.com:443/CC0402KRX5R6BB105-Yageo-datasheet-137875056.pdf?src-supplier=Future+Electronics, ComponentLink14URL=https://datasheet.octopart.com:443/CC0402KRX5R6BB105-Yageo-datasheet-137875056.pdf?src-supplier=Future+Electronics, ComponentLink15Description=https://datasheet.octopart.com:443/CC0402KRX5R6BB105-Yageo-datasheet-137700085.pdf?src-supplier=Future+Electronics, ComponentLink15URL=https://datasheet.octopart.com:443/CC0402KRX5R6BB105-Yageo-datasheet-137700085.pdf?src-supplier=Future+Electronics, ComponentLink16Description=https://datasheet.octopart.com:443/CC0402KRX5R6BB105-Yageo-datasheet-59875459.pdf?src-supplier=Future+Electronics, ComponentLink16URL=https://datasheet.octopart.com:443/CC0402KRX5R6BB105-Yageo-datasheet-59875459.pdf?src-supplier=Future+Electronics, ComponentLink17Description=https://datasheet.octopart.com:443/CC0402KRX5R6BB105-Yageo-datasheet-24578986.pdf?src-supplier=Future+Electronics, ComponentLink17URL=https://datasheet.octopart.com:443/CC0402KRX5R6BB105-Yageo-datasheet-24578986.pdf?src-supplier=Future+Electronics, ComponentLink18Description=https://datasheet.octopart.com:443/CC0402KRX5R6BB105-Yageo-datasheet-8701639.pdf?src-supplier=element14, ComponentLink18URL=https://datasheet.octopart.com:443/CC0402KRX5R6BB105-Yageo-datasheet-8701639.pdf?src-supplier=element14, ComponentLink19Description=https://datasheet.octopart.com:443/CC0402KRX5R6BB105-Yageo-datasheet-68071816.pdf?src-supplier=Megastar, ComponentLink19URL=https://datasheet.octopart.com:443/CC0402KRX5R6BB105-Yageo-datasheet-68071816.pdf?src-supplier=Megastar, ComponentLink20Description=http://sigma.octopart.com:80/conflict_mineral_statement/Yageo-company-3.pdf?src-supplier=Compliance+Statements, ComponentLink20URL=http://sigma.octopart.com:80/conflict_mineral_statement/Yageo-company-3.pdf?src-supplier=Compliance+Statements, ComponentLink21Description=http://sigma.octopart.com:80/rohs_statement/Yageo-company-2.pdf?src-supplier=Compliance+Statements, ComponentLink21URL=http://sigma.octopart.com:80/rohs_statement/Yageo-company-2.pdf?src-supplier=Compliance+Statements, Composition=Ceramic, Country of Origin="Mainland China, Taiwan", Depth=500µm, Dissipation Factor=15%, Export Control Classification Number (ECCN) Code=EAR99, Halogen Free="Halogen Free", Harmonized Tariff Schedule (HTS) Code=8532.24.00.20, Height=500µm, Introduction Date=2009-04-16, Lead Free="Lead Free", Length=1mm, Lifecycle Status=Production, Manufacturer Part Number=CC0402KRX5R6BB105, Material=Ceramic, Mounting Technology="Surface Mount", Number of Terminals=2, Packaging="Cut Tape (CT)", Pins=2, Pricing="1=0,11, 10=0,06, 50=0,0412, 100=0,0356, 500=0,02612, 1000=0,02323, 2500=0,02018, 5000=0,01835 (USD)", Radiation Hardening=No, REACH SVHC=Yes, RoHS=Compliant, Schedule B="8532240020, 8532240020|8532240020|8532240020|8532240020|8532240020|8532240020|8532240020|8532240020|8532240020|8532240020|8532240020|8532240020|8532240020|8532240020|8532240020|8532240020|8532240020|8532240020|8532240020|8532240020|8532240020|8532240020|8532240020|85", Stock=575623, Supplier=DigiKey, Termination=SMD/SMT, Thickness=558.8µm, Voltage Rating (DC)=10V, Width=500µm
C12 C19: library part GRM155R61A106ME11D, "10V 10uF X5R ±20% 0402 Multilayer Ceramic Capacitors MLCC - SMD/SMT ROHS", Case/Package=0402, Dielectric=X5R, Dielectric Material=Ceramic, LCSC Part=C408132, Manufacturer=Murata, Manufacturer Lifecycle Status="IN PRODUCTION", Max Operating Temperature=85°C, Min Operating Temperature=-55°C, Supplier Part Number=490-GRM155R61A106ME11DCT-ND, Tolerance=20%, Voltage Rating=10V, Category="Ceramic Capacitors", ComponentLink1Description=https://datasheet.octopart.com:443/GRM155R61A106ME11D-Murata-datasheet-155239053.pdf?src-supplier=Newark, ComponentLink1URL=https://datasheet.octopart.com:443/GRM155R61A106ME11D-Murata-datasheet-155239053.pdf?src-supplier=Newark, ComponentLink2Description=https://datasheet.octopart.com:443/GRM155R61A106ME11D-Murata-datasheet-178522865.pdf?src-supplier=Arrow.cn, ComponentLink2URL=https://datasheet.octopart.com:443/GRM155R61A106ME11D-Murata-datasheet-178522865.pdf?src-supplier=Arrow.cn, ComponentLink3Description=https://datasheet.octopart.com:443/GRM155R61A106ME11D-Murata-datasheet-165579666.pdf?src-supplier=TME, ComponentLink3URL=https://datasheet.octopart.com:443/GRM155R61A106ME11D-Murata-datasheet-165579666.pdf?src-supplier=TME, ComponentLink4Description=https://datasheet.octopart.com:443/GRM155R61A106ME11D-Murata-datasheet-141266224.pdf?src-supplier=Ciiva, ComponentLink4URL=https://datasheet.octopart.com:443/GRM155R61A106ME11D-Murata-datasheet-141266224.pdf?src-supplier=Ciiva, ComponentLink5Description=https://datasheet.octopart.com:443/GRM155R61A106ME11D-Murata-datasheet-140689744.pdf?src-supplier=Ciiva, ComponentLink5URL=https://datasheet.octopart.com:443/GRM155R61A106ME11D-Murata-datasheet-140689744.pdf?src-supplier=Ciiva, ComponentLink6Description=https://datasheet.octopart.com:443/GRM155R61A106ME11D-Murata-datasheet-138740692.pdf?src-supplier=Ciiva, ComponentLink6URL=https://datasheet.octopart.com:443/GRM155R61A106ME11D-Murata-datasheet-138740692.pdf?src-supplier=Ciiva, ComponentLink7Description=https://datasheet.octopart.com/GRM155R61A106ME11D-Murata-datasheet-12515295.pdf, ComponentLink7URL=https://datasheet.octopart.com/GRM155R61A106ME11D-Murata-datasheet-12515295.pdf, ComponentLink8Description=https://datasheet.octopart.com/GRM155R61A106ME11D-Murata-datasheet-12510076.pdf, ComponentLink8URL=https://datasheet.octopart.com/GRM155R61A106ME11D-Murata-datasheet-12510076.pdf, ComponentLink9Description=https://datasheet.octopart.com/GRM155R61A106ME11D-Murata-datasheet-11978611.pdf, ComponentLink9URL=https://datasheet.octopart.com/GRM155R61A106ME11D-Murata-datasheet-11978611.pdf, ComponentLink10Description=https://datasheet.octopart.com/GRM155R61A106ME11D-Murata-datasheet-10025737.pdf, ComponentLink10URL=https://datasheet.octopart.com/GRM155R61A106ME11D-Murata-datasheet-10025737.pdf, ComponentLink11Description=https://datasheet.octopart.com/GRM155R61A106ME11D-Murata-datasheet-8819587.pdf, ComponentLink11URL=https://datasheet.octopart.com/GRM155R61A106ME11D-Murata-datasheet-8819587.pdf, ComponentLink12Description=http://sigma.octopart.com:80/reach_statement/Murata-company-16.pdf?src-supplier=Compliance+Statements, ComponentLink12URL=http://sigma.octopart.com:80/reach_statement/Murata-company-16.pdf?src-supplier=Compliance+Statements, Country of Origin=Philippines, Export Control Classification Number (ECCN) Code=EAR99, Harmonized Tariff Schedule (HTS) Code=8532.24.00.20, Height=500µm, Introduction Date=2018-10-26, Length=1mm, Lifecycle Status=Production, Manufacturer Part Number=GRM155R61A106ME11D, Material=Ceramic, Mounting Technology="Surface Mount", Number of Terminals=2, Pricing="1=0,11, 10=0,063, 50=0,0436, 100=0,0376, 500=0,02772, 1000=0,02467, 2500=0,02148, 5000=0,01955 (USD)", REACH SVHC=Yes, RoHS=Compliant, Stock=2420356, Supplier=DigiKey, Thickness=500µm, Voltage Rating (DC)=10V, Width=500µm
C14 C15: "Cap Ceramic 3.3pF 100V C0G 0.25pF Pad SMD 0402 125C T/R", Case Code (Imperial)=0402, Case Code (Metric)=1005, Dielectric=C0G, Dielectric Material=Ceramic, LCSC Part=C3861813, Manufacturer=Murata, Manufacturer Lifecycle Status=NRND, Max Operating Temperature=125°C, Min Operating Temperature=-55°C, Supplier Part Number=490-7287-1-ND, Voltage Rating=100V, Case/Package=0402, Category="Ceramic Capacitors", ComponentLink1Description=https://datasheet.octopart.com:443/GRM1555C2A3R3CA01D-Murata-datasheet-165579666.pdf?src-supplier=TME, ComponentLink1URL=https://datasheet.octopart.com:443/GRM1555C2A3R3CA01D-Murata-datasheet-165579666.pdf?src-supplier=TME, ComponentLink2Description=https://datasheet.octopart.com:443/GRM1555C2A3R3CA01D-Murata-datasheet-141266224.pdf?src-supplier=Ciiva, ComponentLink2URL=https://datasheet.octopart.com:443/GRM1555C2A3R3CA01D-Murata-datasheet-141266224.pdf?src-supplier=Ciiva, ComponentLink3Description=https://datasheet.octopart.com:443/GRM1555C2A3R3CA01D-Murata-datasheet-140684059.pdf?src-supplier=Ciiva, ComponentLink3URL=https://datasheet.octopart.com:443/GRM1555C2A3R3CA01D-Murata-datasheet-140684059.pdf?src-supplier=Ciiva, ComponentLink4Description=https://datasheet.octopart.com:443/GRM1555C2A3R3CA01D-Murata-datasheet-138740022.pdf?src-supplier=Ciiva, ComponentLink4URL=https://datasheet.octopart.com:443/GRM1555C2A3R3CA01D-Murata-datasheet-138740022.pdf?src-supplier=Ciiva, ComponentLink5Description=https://datasheet.octopart.com:443/GRM1555C2A3R3CA01D-Murata-datasheet-96971104.pdf?src-supplier=Future+Electronics, ComponentLink5URL=https://datasheet.octopart.com:443/GRM1555C2A3R3CA01D-Murata-datasheet-96971104.pdf?src-supplier=Future+Electronics, ComponentLink6Description=https://datasheet.octopart.com/GRM1555C2A3R3CA01D-Murata-datasheet-12515295.pdf, ComponentLink6URL=https://datasheet.octopart.com/GRM1555C2A3R3CA01D-Murata-datasheet-12515295.pdf, ComponentLink7Description=https://datasheet.octopart.com/GRM1555C2A3R3CA01D-Murata-datasheet-12510076.pdf, ComponentLink7URL=https://datasheet.octopart.com/GRM1555C2A3R3CA01D-Murata-datasheet-12510076.pdf, ComponentLink8Description=https://datasheet.octopart.com/GRM1555C2A3R3CA01D-Murata-datasheet-11978611.pdf, ComponentLink8URL=https://datasheet.octopart.com/GRM1555C2A3R3CA01D-Murata-datasheet-11978611.pdf, ComponentLink9Description=https://datasheet.octopart.com/GRM1555C2A3R3CA01D-Murata-datasheet-10025737.pdf, ComponentLink9URL=https://datasheet.octopart.com/GRM1555C2A3R3CA01D-Murata-datasheet-10025737.pdf, ComponentLink10Description=https://datasheet.octopart.com/GRM1555C2A3R3CA01D-Murata-datasheet-8819587.pdf, ComponentLink10URL=https://datasheet.octopart.com/GRM1555C2A3R3CA01D-Murata-datasheet-8819587.pdf, ComponentLink11Description=https://datasheet.octopart.com/GRM1555C2A3R3CA01D-Murata-datasheet-17504032.pdf, ComponentLink11URL=https://datasheet.octopart.com/GRM1555C2A3R3CA01D-Murata-datasheet-17504032.pdf, ComponentLink12Description=http://sigma.octopart.com:80/reach_statement/Murata-company-16.pdf?src-supplier=Compliance+Statements, ComponentLink12URL=http://sigma.octopart.com:80/reach_statement/Murata-company-16.pdf?src-supplier=Compliance+Statements, Export Control Classification Number (ECCN) Code=EAR99, Harmonized Tariff Schedule (HTS) Code=8532.24.00.20, Height=500µm, Introduction Date=2013-11-20, Length=1mm, Lifecycle Status=NRND, Manufacturer Part Number=GRM1555C2A3R3CA01D, Mounting Technology="Surface Mount", Number of Terminals=2, Pricing="1=0,1, 10=0,031, 50=0,0208, 100=0,0176, 500=0,01252, 1000=0,01095, 2500=0,0093, 5000=0,00832 (USD)", REACH SVHC=Yes, RoHS=Compliant, Stock=812516, Supplier=DigiKey, Termination=SMD/SMT, Thickness=500µm, Voltage Rating (DC)=100V, Weight=6.010099mg, Width=500µm
C16 C20: library part CC0402FPNPO9BN100, "Ceramic Capacitor, Multilayer, Ceramic, 50V, 1% +Tol, 1% -Tol, C0G, 30ppm/Cel TC, 0.00001uF, Surface Mount, 0402", Dielectric Material=Ceramic, LCSC Part=C3896396, Manufacturer="Yageo Group", Max Operating Temperature=125°C, Min Operating Temperature=-55°C, Supplier Part Number=13-CC0402FPNPO9BN100CT-ND, Voltage Rating (DC)=50V, Category="Ceramic Capacitors", China RoHS=Compliant, ComponentLink1Description=https://datasheet.octopart.com:443/CC0402FPNPO9BN100-Yageo-datasheet-182140217.pdf?src-supplier=IHS, ComponentLink1URL=https://datasheet.octopart.com:443/CC0402FPNPO9BN100-Yageo-datasheet-182140217.pdf?src-supplier=IHS, ComponentLink2Description=http://sigma.octopart.com:80/conflict_mineral_statement/Yageo-company-3.pdf?src-supplier=Compliance+Statements, ComponentLink2URL=http://sigma.octopart.com:80/conflict_mineral_statement/Yageo-company-3.pdf?src-supplier=Compliance+Statements, ComponentLink3Description=http://sigma.octopart.com:80/rohs_statement/Yageo-company-2.pdf?src-supplier=Compliance+Statements, ComponentLink3URL=http://sigma.octopart.com:80/rohs_statement/Yageo-company-2.pdf?src-supplier=Compliance+Statements, Country of Origin="Mainland China, Taiwan", Export Control Classification Number (ECCN) Code=EAR99, Harmonized Tariff Schedule (HTS) Code=8532.24.00.20, Height=500µm, Introduction Date=2009-04-16, Length=1mm, Lifecycle Status=Production, Manufacturer Part Number=CC0402FPNPO9BN100, Mounting Technology="Surface Mount", Number of Terminals=2, Pricing="1=0,1, 10=0,05, 50=0,034, 100=0,0292, 500=0,02122, 1000=0,01878, 2500=0,01622, 5000=0,01467 (USD)", REACH SVHC=Yes, RoHS=Compliant, Stock=180901, Supplier=DigiKey, Width=500µm